# EAGLE board Wall-E.withname (EAGLE 7.2.0)
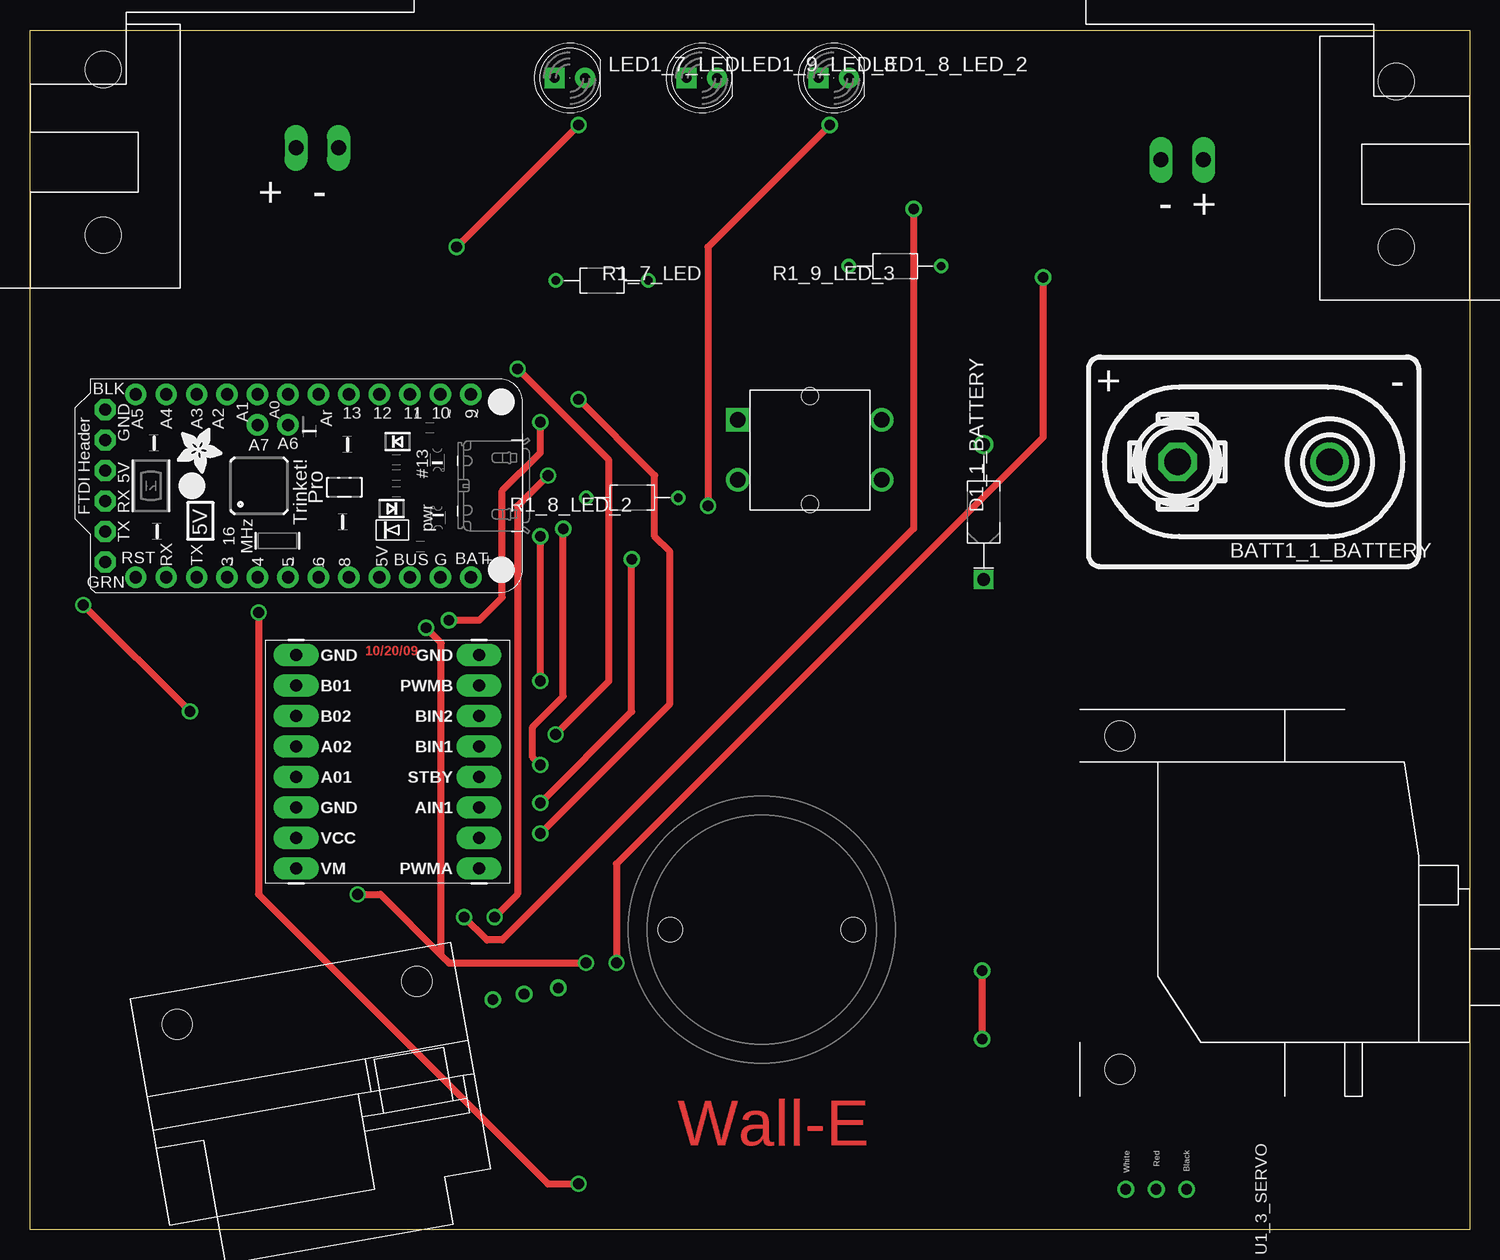
[diagram p0: board, top side]
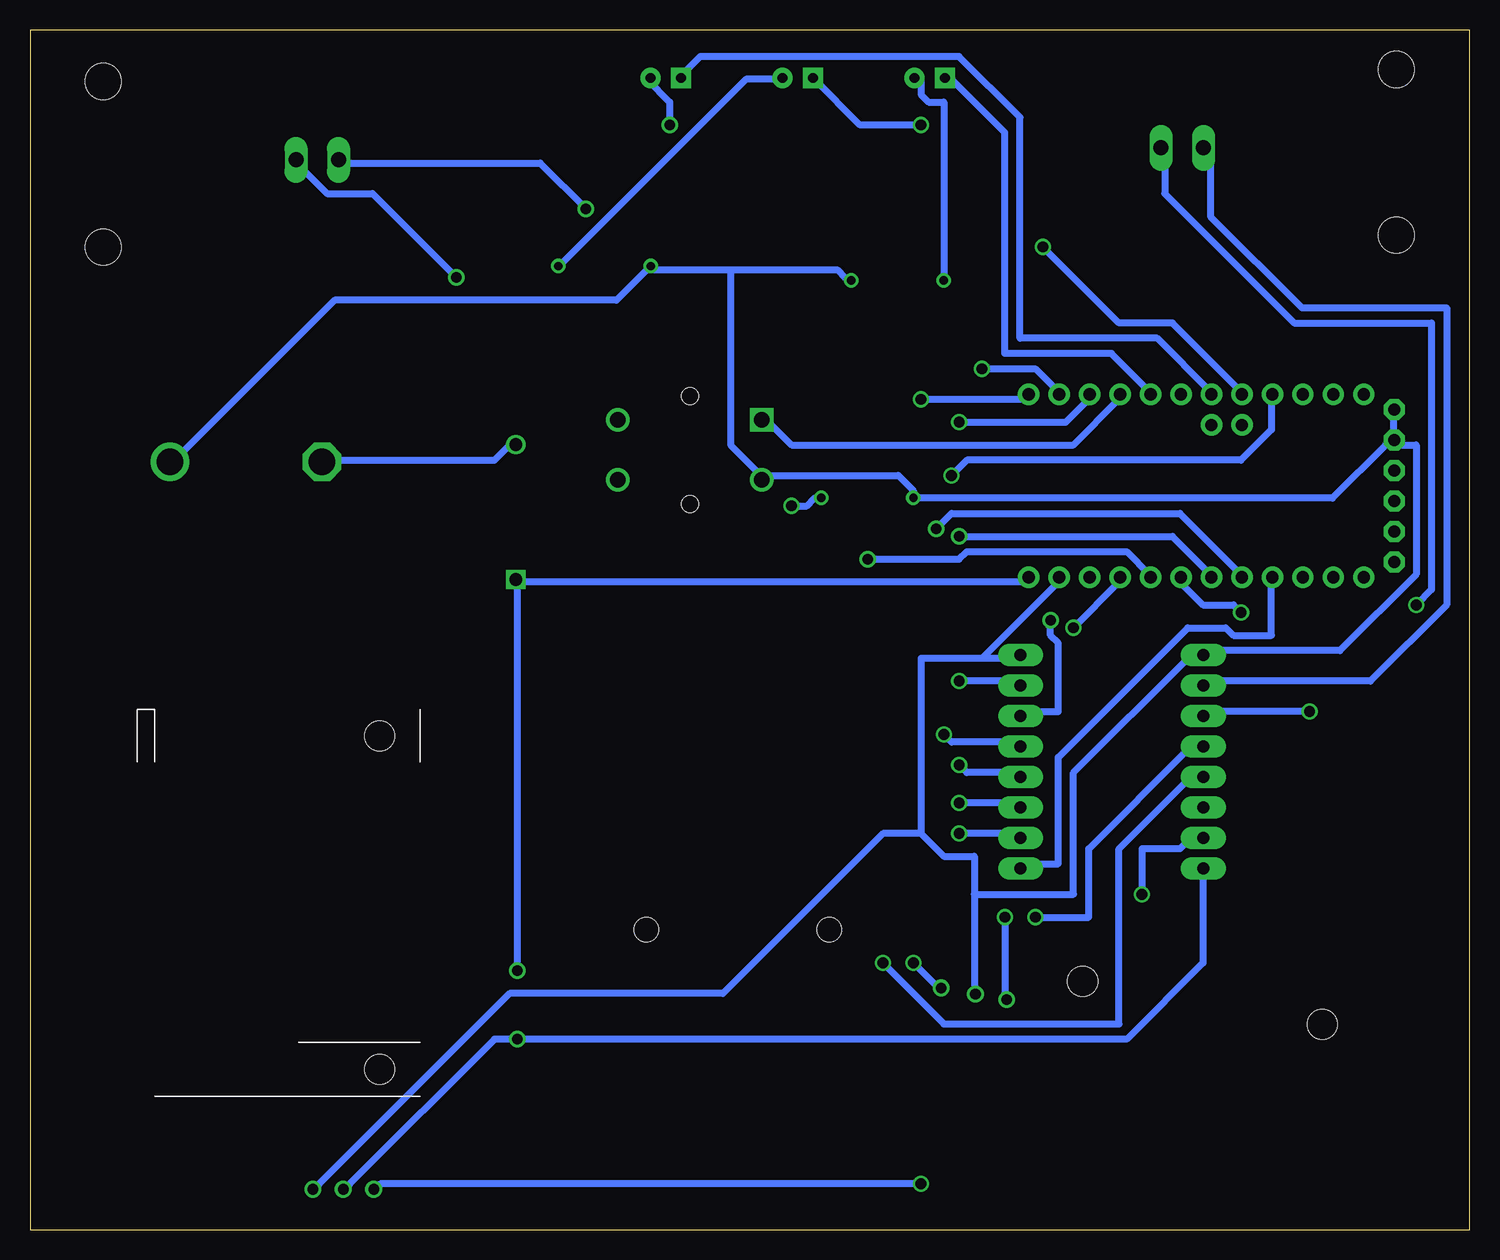
[diagram p1: board, bottom side, seen from below]

Size 120 x 100 mm. Coordinates in mm from the lower left corner, seen from the top.
Outline: 0,0 0,100 120,100 120,0 0,0
Copper layers (1*16): Top 0.035mm / dielectric 1.5mm / Bottom 0.035mm
Design rules "default": minimum track width 0.6mm, minimum drill 0.9mm, track to track 15mil, track to pad 0.6mm, pad to pad 0.5mm, via to via 0.38mm, smd to smd 8mil, copper to edge 40mil, drill to drill 8mil, minimum pad ring 10mil, minimum via ring 8mil, stop-mask expansion 4mil, vias tented up to drill 0mil, thermal gap 10mil
tRestrict: area 105.8,61.5 to 110.9,66.5; area 14.6,52.6 to 18.2,56.2; area 14.6,67.8 to 18.2,71.4; area 17.2,52.6 to 20.8,56.2; area 17.2,67.8 to 20.8,71.4; area 19.4,28.3 to 25,32; area 19.4,30.8 to 25,34.5; area 19.4,35.9 to 25,39.6; area 19.4,38.4 to 25,42.1; area 19.4,41 to 25,44.7; area 19.4,43.5 to 25,47.2; area 19.4,46.1 to 25,49.7; 49 more areas
vRestrict: area -45,55 to 34.4,128.6; area 19.6,28.7 to 40,49.3; area 3.7,53.1 to 41.7,70.9; area 42,93.1 to 47.5,98.9; area 43,77.8 to 52.4,80.4; area 45.5,59.7 to 54.9,62.3; area 49.6,13.6 to 72.6,36.7; area 53,93.1 to 58.5,98.9; area 57.5,58 to 72.5,72; area 64,93.1 to 69.5,98.9; area 67.4,79 to 76.8,81.6; area 77.9,53.1 to 81.1,66.5; 4 more areas

## Footprints (pad centres in the part's own frame; a part is rotated, then mirrored left to right if it is on the bottom)
BUTTON-TACTILE-SQUARE-ADAFRUIT1010 = drill 1.3 square: P -6,2.5 | drill 1.3: P2 6,2.5; S -6,-2.5; S2 6,-2.5 | hole 1.4: 0,-4.5; 0,4.5
BATTERY_9V_KEYSTONE_968 = drill 2.2: N 6.35,0 | drill 2.2 octagon: P -6.35,0
DIOAD1125W78L520D270_HS = drill 1.06 pad 1.59: A 5.625,0 | drill 1.06 pad 1.59 square: C -5.625,0
ANALOG_DISTANCE_SENSOR = drill 0.9: P$GND -5.265,-5.8; P$V0 -2.63,-5.8; P$VCC -8.17,-5.8 | hole 2.5: 23.65,-8.35; 3.35,-8.4
SPARKFUN_DUAL_MOTOR_DRIVER = drill 1.016 pad 1.88 long: A01 7.62,1.27; A02 7.62,-1.27; AIN1 -7.62,3.81; AIN2 -7.62,6.35; B01 7.62,-6.35; B02 7.62,-3.81; BIN1 -7.62,-1.27; BIN2 -7.62,-3.81; GND -7.62,-8.89; GND1 7.62,3.81; GND2 7.62,-8.89; PWMA -7.62,8.89; PWMB -7.62,-6.35; STBY -7.62,1.27; VCC 7.62,6.35; VM 7.62,8.89
SPARKFUN_HOBBY_MOTOR_LEFT = drill 1.27 long: + -41.18,-1.18; - -44.72,-1.18 | hole 3: -25.1,-7.7; -25.1,6.1
LED5MM = drill 0.813 pad 1.676 square: A -1.27,0 | drill 0.813 pad 1.676: K 1.27,0
RESAD770W45L370D210_HS = drill 0.7 pad 1.1: 1 -3.85,0; 2 3.85,0
SPARKFUN_HOBBY_MOTOR = drill 1.27 long: + 41.18,-1.18; - 44.72,-1.18 | hole 3: 25.1,-7.7; 25.1,6.1
ADAFRUIT-PRO-TRINKET-5V = drill 1.016 pad 1.778: +5V 7.62,24.13; A0 -7.62,16.51; A1 -7.62,13.97; A2 -7.62,11.43; A3 -7.62,8.89; A4 -7.62,6.35; A5 -7.62,3.81; AREF -7.62,19.05; D3 7.62,11.43; D4 7.62,13.97; D5 7.62,16.51; D6 7.62,19.05; D8 7.62,21.59; D9 -7.62,31.75; D10 -7.62,29.21; D11 -7.62,26.67; D12 -7.62,24.13; D13 -7.62,21.59; GND2 7.62,29.21; RESET 7.62,3.81; RXD1 7.62,6.35; TXD1 7.62,8.89; VBAT 7.62,31.75; VBUS1 7.62,26.67 | drill 1 pad 1.778: A6 -5.08,16.51; A7 -5.08,13.97 | drill 1.016 pad 1.778 octagon: DTR/RTS 6.35,1.27; GND -6.35,1.27; GND1 -3.81,1.27; RXD 1.27,1.27; TXD 3.81,1.27; VBUS -1.27,1.27
SERVO_MICRO_SIDE = drill 0.9: A1 35.64,-2.66; GND1 35.64,2.42; PWR1 35.64,-0.12 | hole 2.5: -2.15,-3.15; 25.65,-3.15
ADAFRUIT-3/4IN-CASTER = hole 2: -7.62,0; 7.62,0

## Placement (x,y rotation side)
B1_5_BUTTON  BUTTON-TACTILE-SQUARE  [BUTTON-TACTILE-SQUARE-ADAFRUIT1010]  65,65 0 top
BATT1_1_BATTERY  BATTERY-9V-VERTICAL  [BATTERY_9V_KEYSTONE_968]  102,64 0 top
D1_1_BATTERY  [DIOAD1125W78L520D270_HS]  79.5,59.81 90 top
DIST1_4_DISTANCESENSOR  [ANALOG_DISTANCE_SENSOR]  37,13 190 top
DRVR_2_DRIVE  SPARKFUN_DUAL_MOTOR_DRIVER-BOB  [SPARKFUN_DUAL_MOTOR_DRIVER]  29.81,39.01 180 top
L_2_DRIVE  SOLARBOTICS_GM2_LEFTSPARKFUN_HOBBY  [SPARKFUN_HOBBY_MOTOR_LEFT]  -19,89 180 top
LED1_7_LED  [LED5MM]  45,96 0 top
LED1_8_LED_2  [LED5MM]  67,96 0 top
LED1_9_LED_3  [LED5MM]  56,96 0 top
R1_7_LED  330  [RESAD770W45L370D210_HS]  47.69,79.11 0 top
R1_8_LED_2  330  [RESAD770W45L370D210_HS]  50.2,61.01 180 top
R1_9_LED_3  330  [RESAD770W45L370D210_HS]  72.11,80.31 180 top
R_2_DRIVE  SOLARBOTICS_GM2SPARKFUN_HOBBY  [SPARKFUN_HOBBY_MOTOR]  139,88 180 top
U1_0_BRAIN  [ADAFRUIT-PRO-TRINKET-5V]  5,62 270 top
U1_3_SERVO  [SERVO_MICRO_SIDE]  94,39 270 top
U1_6_CASTER  [ADAFRUIT-3/4IN-CASTER]  61,25 0 top

## Library data of the parts
B1_5_BUTTON BATT1_1_BATTERY DIST1_4_DISTANCESENSOR L_2_DRIVE LED1_7_LED LED1_8_LED_2 LED1_9_LED_3 R_2_DRIVE U1_3_SERVO U1_6_CASTER = Components
D1_1_BATTERY = KoalaBuild; DATASHEET: http://www.st.com/web/en/resource/technical/document/datasheet/CD00001625.pdf; DB: /Users/sciencectn/Documents/nvsl/Gadgets/Tools/Koala/Koala/PartLibrary/Digikey/Schottky-Diodes-TH.csv; DEVICE: TH-DO-41-AND-DO-204AL; DIST: Digikey; DISTPN: 497-4547-1-ND; IMAGE: http://media.digikey.com/photos/STMicro%20Photos/1N5819.JPG; IRECT: 1A; MFR: STMicroelectronics; MIN_QTY: 1; MPN: 1N5817; PACKAGE: DIOAD1125W78L520D270_HS; PRICE: $0.57; SIZE: TH; STOCK: STOCK; VALUE: 450mV; VREV: 20V
DRVR_2_DRIVE U1_0_BRAIN = BOBs
R1_7_LED R1_8_LED_2 R1_9_LED_3 = KoalaBuild; CASE: TH; DATASHEET: http://www.yageo.com/NewPortal/yageodocoutput?fileName=/pdf/throughhole/Yageo_LR_CFR_2013.pdf; DB: /Users/sciencectn/Documents/nvsl/Gadgets/Tools/Koala/Koala/PartLibrary/Digikey/Resistors-TH.csv; DEVICE: TH-1/6W-CARBON; DIST: Digikey; DISTPN: 330EBK-ND; IMAGE: http://media.digikey.com/Renders/Yageo%20Renders/CFR-12JR-330R.jpg; MFR: Yageo; MIN_QTY: 1; MPN: CFR-12JB-52-330R; PACKAGE: RESAD770W45L370D210_HS; PRICE: $0.10; PWR: 167mW; SIZE: TH; STOCK: STOCK; TOL: 5%; VALUE_QUERY: 330

## Nets
+5V_0_BRAIN: DIST1_4_DISTANCESENSOR.P$VCC DRVR_2_DRIVE.VCC U1_0_BRAIN.+5V
A0_0_BRAIN: LED1_8_LED_2.A U1_0_BRAIN.A0
A1_0_BRAIN: LED1_9_LED_3.A U1_0_BRAIN.A1
A01_2_DRIVE: DRVR_2_DRIVE.A01 R_2_DRIVE.+
A2_0_BRAIN: DIST1_4_DISTANCESENSOR.P$V0 U1_0_BRAIN.A2
A02_2_DRIVE: DRVR_2_DRIVE.A02 R_2_DRIVE.-
A3_0_BRAIN: U1_0_BRAIN.A3
A4_0_BRAIN: U1_0_BRAIN.A4
A5_0_BRAIN: U1_0_BRAIN.A5
A6_0_BRAIN: U1_0_BRAIN.A6
A7_0_BRAIN: U1_0_BRAIN.A7
AREF_0_BRAIN: U1_0_BRAIN.AREF
B01_2_DRIVE: DRVR_2_DRIVE.B01 L_2_DRIVE.+
B02_2_DRIVE: DRVR_2_DRIVE.B02 L_2_DRIVE.-
D3_0_BRAIN: DRVR_2_DRIVE.PWMA U1_0_BRAIN.D3
D4_0_BRAIN: DRVR_2_DRIVE.STBY U1_0_BRAIN.D4
D5_0_BRAIN: DRVR_2_DRIVE.PWMB U1_0_BRAIN.D5
D6_0_BRAIN: U1_0_BRAIN.D6 U1_3_SERVO.A1
D8_0_BRAIN: DRVR_2_DRIVE.AIN1 U1_0_BRAIN.D8
D9_0_BRAIN: DRVR_2_DRIVE.AIN2 U1_0_BRAIN.D9
D10_0_BRAIN: DRVR_2_DRIVE.BIN1 U1_0_BRAIN.D10
D11_0_BRAIN: DRVR_2_DRIVE.BIN2 U1_0_BRAIN.D11
D12_0_BRAIN: B1_5_BUTTON.P U1_0_BRAIN.D12
D13_0_BRAIN: LED1_7_LED.A U1_0_BRAIN.D13
DTR/RTS_0_BRAIN: U1_0_BRAIN.DTR/RTS
GND1_2_DRIVE: DRVR_2_DRIVE.GND1
GND_5_BUTTON: B1_5_BUTTON.S BATT1_1_BATTERY.N DIST1_4_DISTANCESENSOR.P$GND DRVR_2_DRIVE.GND DRVR_2_DRIVE.GND2 R1_7_LED.2 R1_8_LED_2.2 R1_9_LED_3.2 U1_0_BRAIN.GND U1_0_BRAIN.GND1 U1_0_BRAIN.GND2 U1_3_SERVO.GND1
N$1_1_BATTERY: BATT1_1_BATTERY.P D1_1_BATTERY.A
N$1_7_LED: LED1_7_LED.K R1_7_LED.1
N$1_8_LED_2: LED1_8_LED_2.K R1_8_LED_2.1
N$1_9_LED_3: LED1_9_LED_3.K R1_9_LED_3.1
POS_1_BATTERY: D1_1_BATTERY.C DRVR_2_DRIVE.VM U1_0_BRAIN.VBAT U1_3_SERVO.PWR1
RESET_0_BRAIN: U1_0_BRAIN.RESET
RXD1_0_BRAIN: U1_0_BRAIN.RXD1
RXD_0_BRAIN: U1_0_BRAIN.RXD
TXD1_0_BRAIN: U1_0_BRAIN.TXD1
TXD_0_BRAIN: U1_0_BRAIN.TXD
VBUS1_0_BRAIN: U1_0_BRAIN.VBUS1
VBUS_0_BRAIN: U1_0_BRAIN.VBUS

## Tracks (layer width: path | path; a pad name or v marks a point on that pad's centre or on a via)
+5V_0_BRAIN  (via drill 0.9)
  Top 0.6: v27.3,27.94 29.21,27.94 34.29,22.86 | 34.29,22.86 34.29,48.9 v33.02,50.16 | 34.29,22.86 34.92,22.23 v46.35,22.23
  Bottom 0.6: DRVR_2_DRIVE.VCC 22.23,32.38 23.5,32.38 24.13,31.75 27.3,31.75 v27.3,27.94 | U1_0_BRAIN.+5V 29.21,53.98 v33.02,50.16 | DIST1_4_DISTANCESENSOR.P$VCC 44.45,20.32 v46.35,22.23
A0_0_BRAIN
  Bottom 0.6: U1_0_BRAIN.A0 21.59,69.85 26.04,74.3 37.47,74.3 37.47,92.71 42.55,97.79 64.14,97.79 65.41,96.52 LED1_8_LED_2.A
A1_0_BRAIN  (via drill 0.9)
  Top 0.6: v35.56,81.92 v45.72,92.08
  Bottom 0.6: U1_0_BRAIN.A1 19.05,69.85 24.77,75.56 29.21,75.56 v35.56,81.92 | v45.72,92.08 50.8,92.08 54.61,95.89 LED1_9_LED_3.A
A01_2_DRIVE  (via drill 0.9)
  Top 0.6: v48.9,22.23 48.9,30.48 84.45,66.04 v84.45,79.38
  Bottom 0.6: DRVR_2_DRIVE.A01 22.23,37.47 23.5,37.47 29.21,31.75 29.21,17.14 43.81,17.14 v48.9,22.23 | v84.45,79.38 91.44,86.36 95.25,86.36 97.79,88.9 R_2_DRIVE.+
A2_0_BRAIN  (via drill 0.9)
  Top 0.6: v38.73,26.04 40.64,27.94 40.64,60.33 v43.18,62.87
  Bottom 0.6: U1_0_BRAIN.A2 16.51,69.22 16.51,66.67 19.05,64.14 41.91,64.14 v43.18,62.87 | DIST1_4_DISTANCESENSOR.P$V0 38.73,19.68 v38.73,26.04
A02_2_DRIVE  (via drill 0.9)
  Top 0.6: v36.2,26.04 38.1,24.13 39.37,24.13 73.66,58.42 v73.66,85.09
  Bottom 0.6: DRVR_2_DRIVE.A02 22.23,40.01 23.5,40.01 31.75,31.75 31.75,26.04 v36.2,26.04 | v73.66,85.09 77.47,88.9 93.98,88.9 R_2_DRIVE.-
B01_2_DRIVE
  Bottom 0.6: DRVR_2_DRIVE.B01 21.59,45.72 8.26,45.72 1.91,52.07 1.91,76.83 13.97,76.83 21.59,84.45 21.59,90.17 L_2_DRIVE.+
B02_2_DRIVE  (via drill 0.9)
  Top 0.6: v4.45,52.07 v13.34,43.18
  Bottom 0.6: v13.34,43.18 21.59,43.18 DRVR_2_DRIVE.B02 | L_2_DRIVE.- 25.4,90.17 25.4,86.36 14.61,75.56 3.17,75.56 3.17,53.34 v4.45,52.07
D3_0_BRAIN
  Bottom 0.6: U1_0_BRAIN.D3 16.51,53.98 16.51,49.53 19.68,49.53 20.32,50.16 23.5,50.16 34.29,39.37 34.29,30.48 36.83,30.48 DRVR_2_DRIVE.PWMA
D4_0_BRAIN  (via drill 0.9)
  Top 0.6: v42.55,38.73 41.91,39.37 41.91,41.91 44.45,44.45 v44.45,58.42
  Bottom 0.6: U1_0_BRAIN.D4 19.05,54.61 24.13,59.69 43.18,59.69 v44.45,58.42 | DRVR_2_DRIVE.STBY 37.47,38.1 41.91,38.1 v42.55,38.73
D5_0_BRAIN  (via drill 0.9)
  Top 0.6: v42.55,45.72 v42.55,57.78
  Bottom 0.6: U1_0_BRAIN.D5 21.59,54.61 24.77,57.78 v42.55,57.78 | DRVR_2_DRIVE.PWMB 37.47,45.72 v42.55,45.72
D6_0_BRAIN  (via drill 0.9)
  Top 0.6: v19.05,51.44 19.05,27.94 43.18,3.81 v45.72,3.81
  Bottom 0.6: v19.05,51.44 19.68,52.07 22.23,52.07 24.13,53.98 U1_0_BRAIN.D6 | v45.72,3.81 90.81,3.81 U1_3_SERVO.A1
D8_0_BRAIN  (via drill 0.9)
  Top 0.6: v42.55,35.56 50.16,43.18 v50.16,55.88
  Bottom 0.6: U1_0_BRAIN.D8 26.67,54.61 28.57,56.52 41.91,56.52 42.55,55.88 v50.16,55.88 | DRVR_2_DRIVE.AIN1 37.47,35.56 v42.55,35.56
D9_0_BRAIN  (via drill 0.9)
  Top 0.6: v42.55,33.02 53.34,43.81 53.34,56.52 52.07,57.78 52.07,62.87 v45.72,69.22
  Bottom 0.6: U1_0_BRAIN.D9 36.83,69.22 v45.72,69.22 | DRVR_2_DRIVE.AIN2 37.47,33.02 v42.55,33.02
D10_0_BRAIN  (via drill 0.9)
  Top 0.6: v43.81,41.27 48.26,45.72 48.26,64.14 v40.64,71.75
  Bottom 0.6: U1_0_BRAIN.D10 34.29,69.85 36.2,71.75 v40.64,71.75 | DRVR_2_DRIVE.BIN1 37.47,40.64 43.18,40.64 v43.81,41.27
D11_0_BRAIN  (via drill 0.9)
  Top 0.6: v34.92,50.8 37.47,50.8 39.37,52.7 39.37,61.59 42.55,64.77 v42.55,67.31
  Bottom 0.6: U1_0_BRAIN.D11 31.75,69.22 33.66,67.31 v42.55,67.31 | v34.92,50.8 34.92,49.53 34.29,48.9 34.29,43.18 36.83,43.18 DRVR_2_DRIVE.BIN2
D12_0_BRAIN
  Bottom 0.6: U1_0_BRAIN.D12 29.21,69.22 33.02,65.41 56.52,65.41 58.42,67.31 B1_5_BUTTON.P
D13_0_BRAIN
  Bottom 0.6: U1_0_BRAIN.D13 26.67,69.85 29.84,73.03 38.73,73.03 38.73,91.44 43.18,95.89 LED1_7_LED.A
GND_5_BUTTON
  Bottom 0.6: BATT1_1_BATTERY.N 107.95,64.14 94.61,77.47 71.12,77.47 68.58,80.01 R1_9_LED_3.2 67.94,80.01 61.59,80.01 | U1_0_BRAIN.GND2 34.29,53.98 40.64,47.62 | DRVR_2_DRIVE.GND 37.47,47.62 40.64,47.62 | 40.64,47.62 45.72,47.62 45.72,33.02 | DIST1_4_DISTANCESENSOR.P$GND 41.27,19.68 41.27,27.94 | 41.27,27.94 33.02,27.94 33.02,38.1 23.5,47.62 22.23,47.62 DRVR_2_DRIVE.GND2 21.59,48.26 10.79,48.26 4.45,54.61 4.45,65.41 5.71,65.41 U1_0_BRAIN.GND1 | 41.27,27.94 41.27,31.11 43.81,31.11 45.72,33.02 | 45.72,33.02 48.9,33.02 62.23,19.68 80.01,19.68 95.89,3.81 U1_3_SERVO.GND1 | R1_7_LED.2 52.07,79.38 52.7,80.01 61.59,80.01 | U1_0_BRAIN.GND1 6.35,65.41 6.99,65.41 11.43,60.96 46.35,60.96 R1_8_LED_2.2 46.35,61.59 47.62,62.87 58.42,62.87 B1_5_BUTTON.S 59.05,62.87 61.59,65.41 61.59,80.01 | U1_0_BRAIN.GND1 6.35,66.04 6.35,67.94 U1_0_BRAIN.GND
N$1_1_BATTERY
  Bottom 0.6: D1_1_BATTERY.A 80.01,65.41 81.28,64.14 95.25,64.14 BATT1_1_BATTERY.P
N$1_7_LED
  Bottom 0.6: R1_7_LED.1 43.81,79.38 43.81,93.98 45.09,93.98 45.72,94.61 45.72,95.89 LED1_7_LED.K
N$1_8_LED_2  (via drill 0.9)
  Top 0.6: v56.52,60.33 56.52,81.92 v66.67,92.08
  Bottom 0.6: R1_8_LED_2.1 54.61,60.96 55.24,60.33 v56.52,60.33 | v66.67,92.08 66.67,93.98 68.58,95.89 LED1_8_LED_2.K
N$1_9_LED_3
  Bottom 0.6: LED1_9_LED_3.K 57.78,95.89 60.33,95.89 75.56,80.64 R1_9_LED_3.1
POS_1_BATTERY  (via drill 0.9)
  Top 0.6: v79.38,15.88 v79.38,21.59
  Bottom 0.6: DRVR_2_DRIVE.VM 22.23,29.84 22.23,22.23 28.57,15.88 v79.38,15.88 81.28,15.88 93.34,3.81 U1_3_SERVO.PWR1 | U1_0_BRAIN.VBAT 36.83,53.98 79.38,53.98 | v79.38,21.59 79.38,53.98 | 79.38,53.98 D1_1_BATTERY.C

## Text on the board
Top: Wall-E